# Altium PCB PCB3.PcbDoc
Units mil, origin at the board's own origin, x right, y up, seen from the top; angles counter-clockwise.
Board outline 1410.03 x 2030.03 mil, 2 copper layers (Top Layer, Bottom Layer); 41 components, 194 nets, 508 pads, 198 vias.
Unrouted connection lines stored in the file: 13.
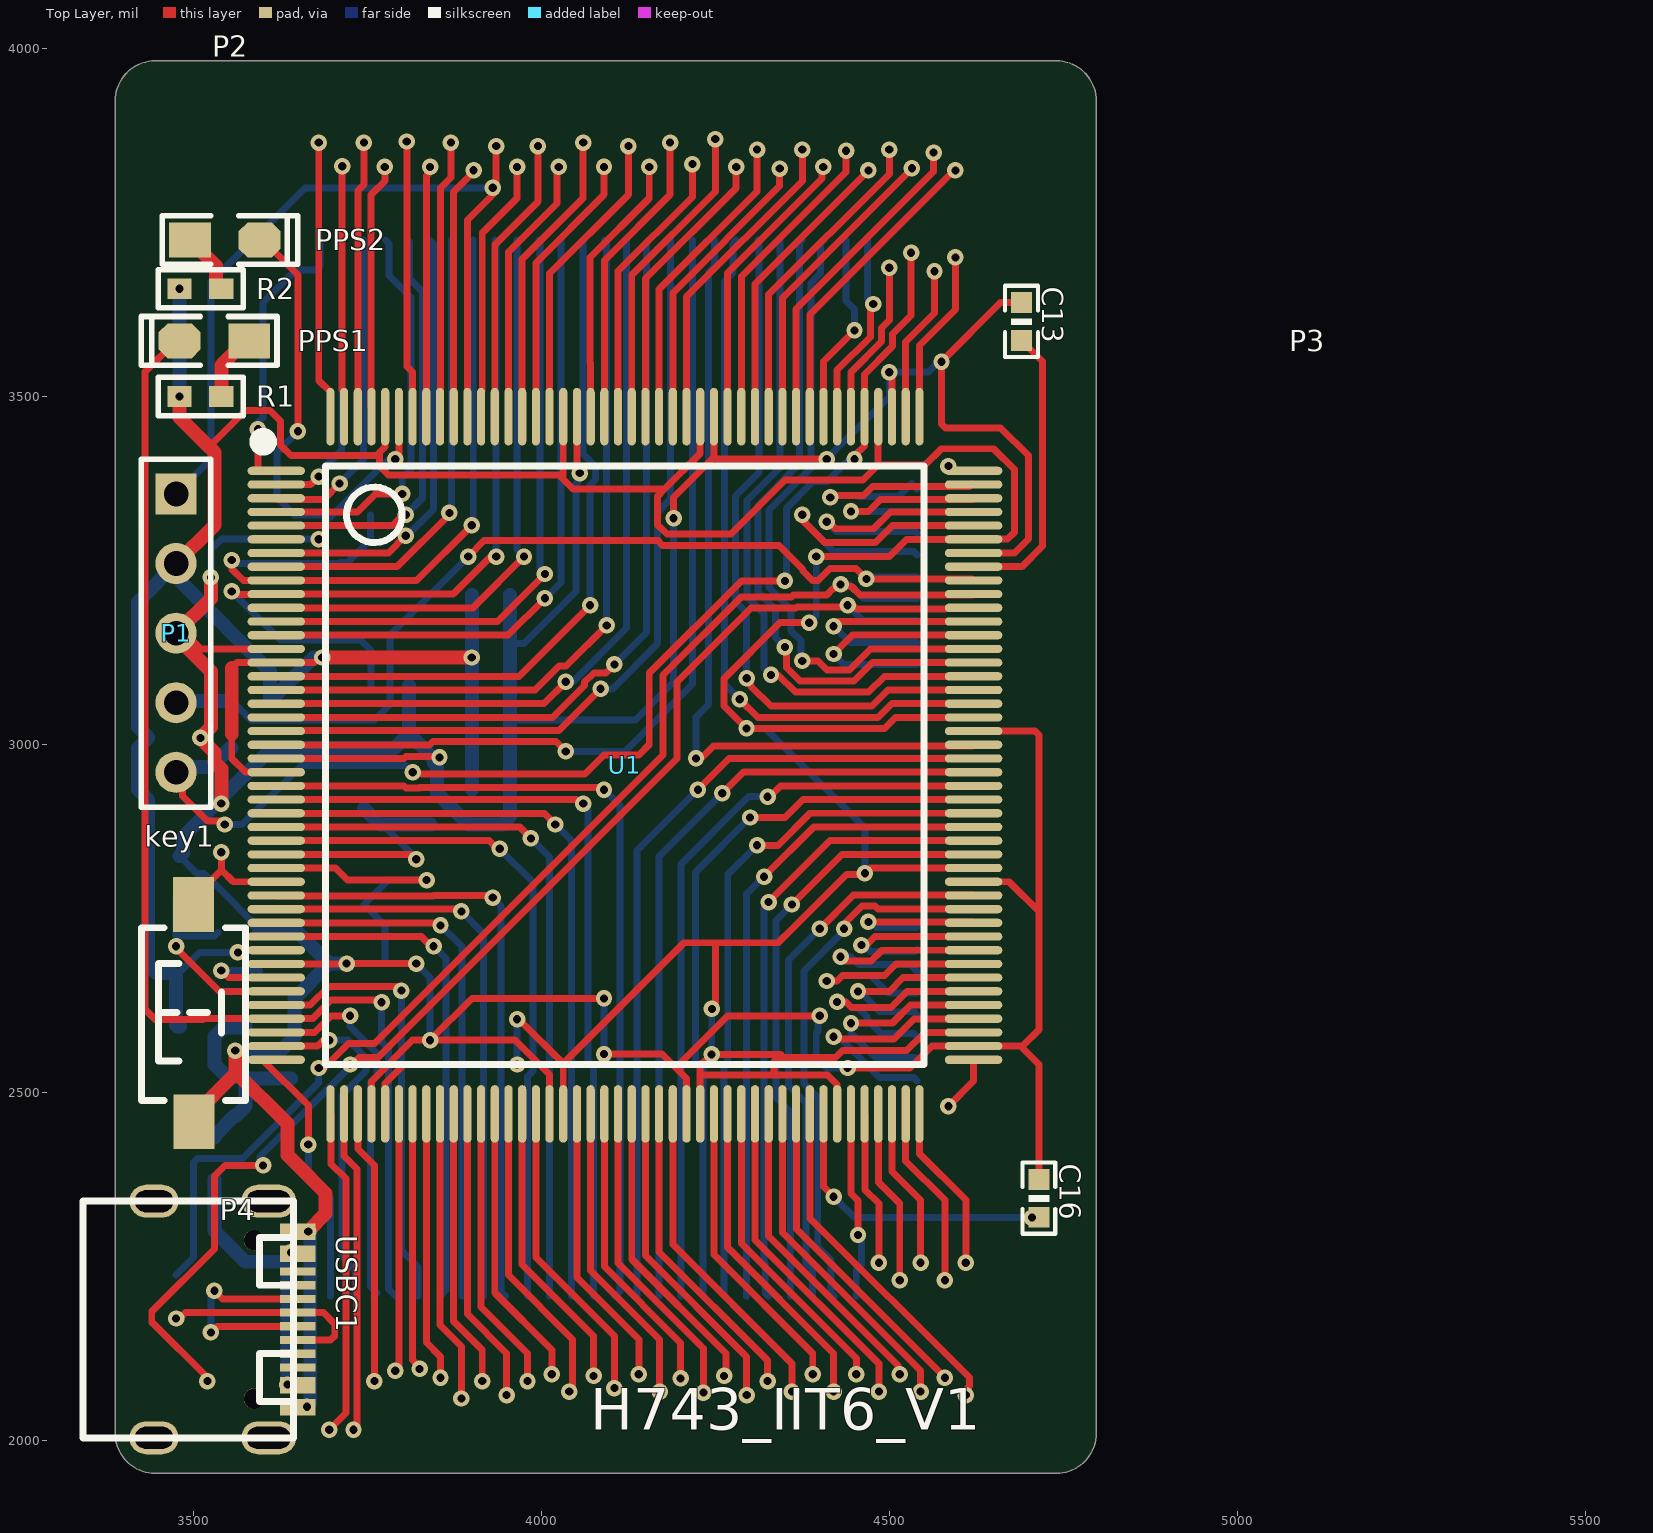
[diagram p0: Top Layer view]
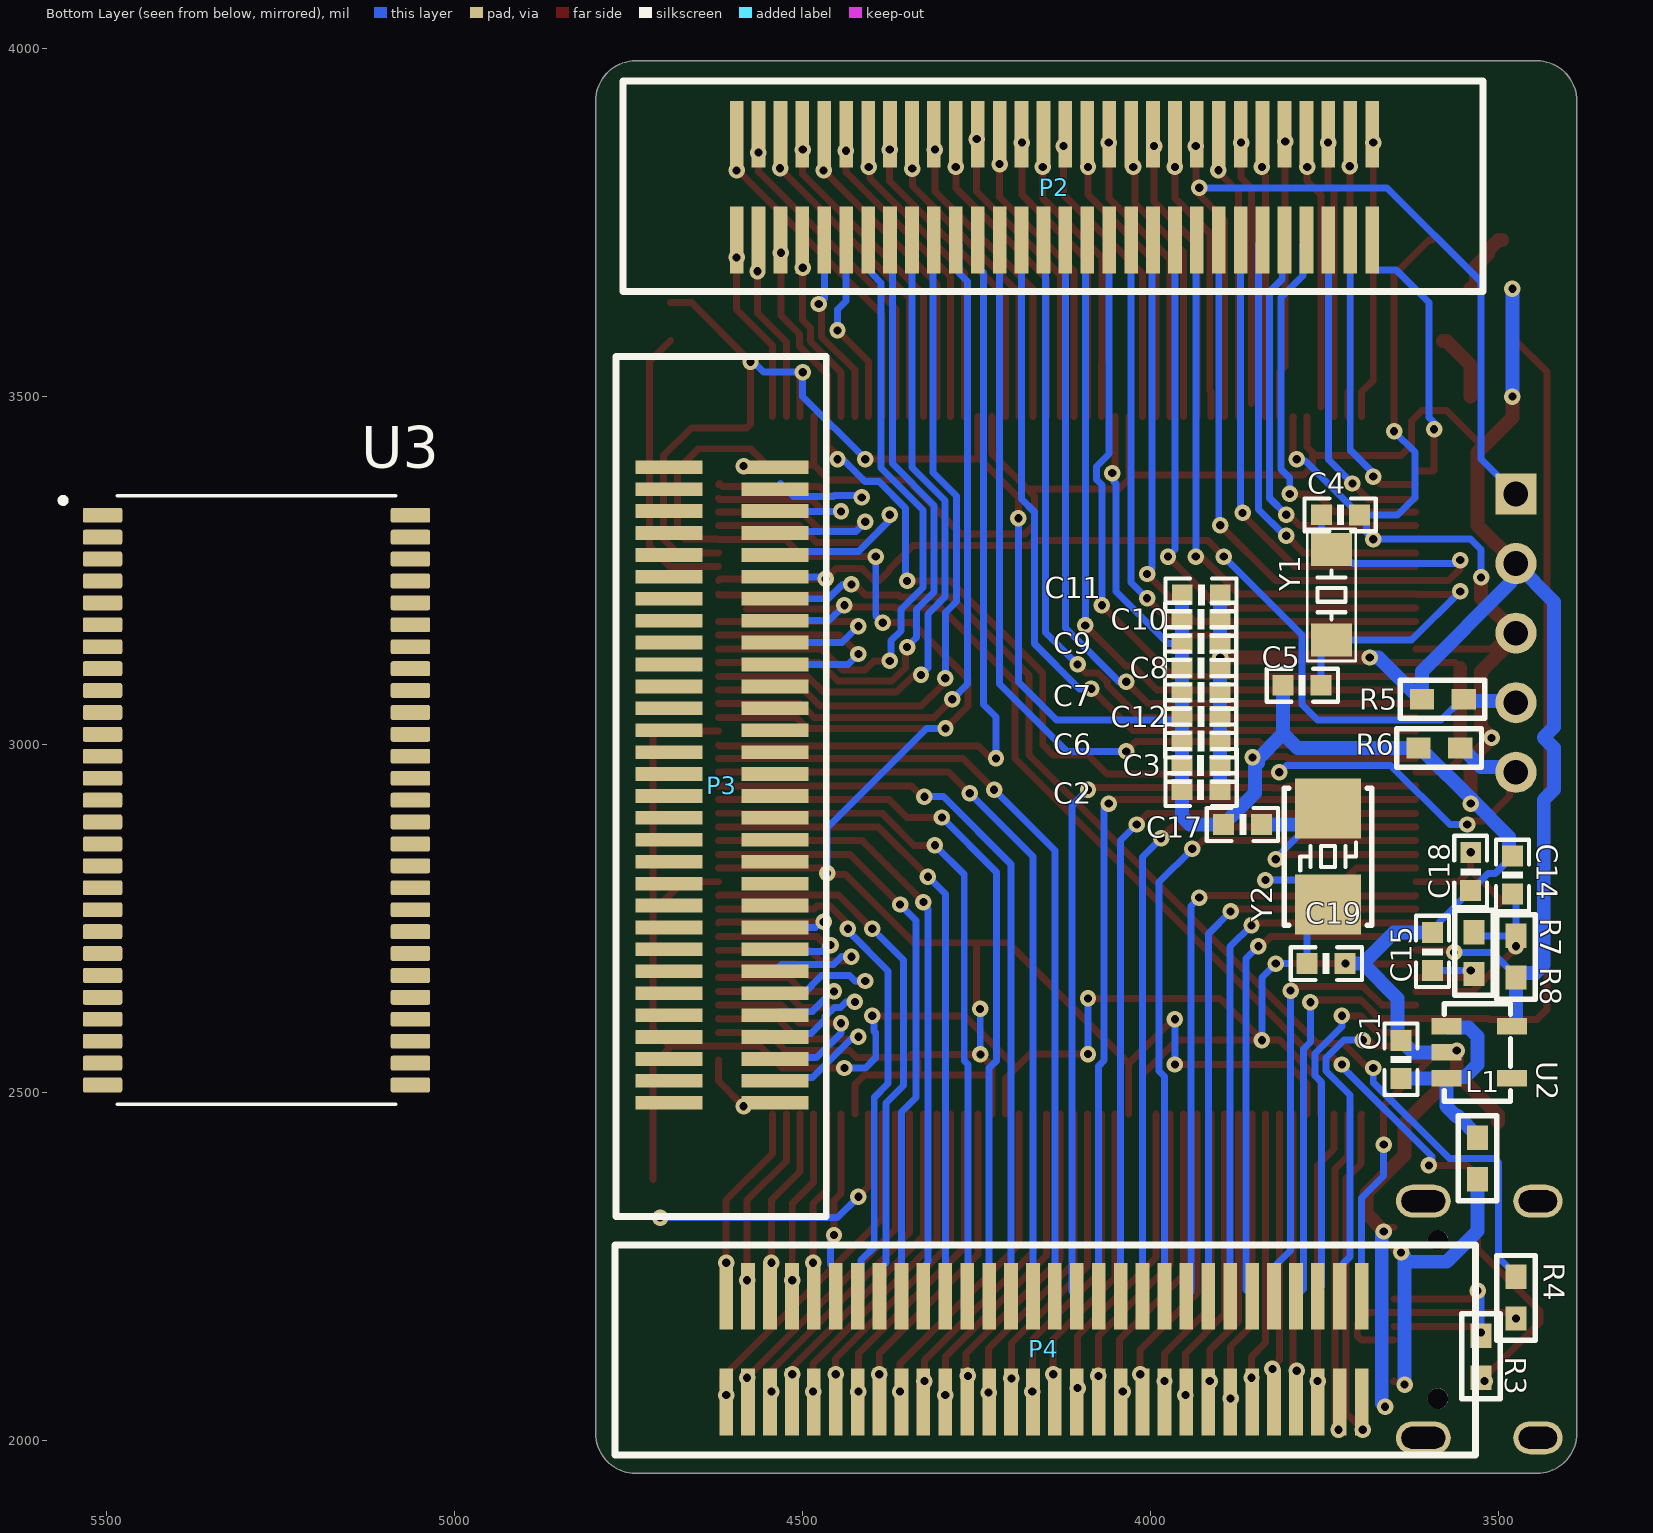
[diagram p1: Bottom Layer view, seen from below]

## Layer stack, top to bottom
Top Solder: solder mask 0.4, Solder Resist, Dk 3.5
Top Layer: signal copper 1.4
Dielectric 1: dielectric 12.6, FR-4, Dk 4.8
Bottom Layer: signal copper 1.4
Bottom Solder: solder mask 0.4, Solder Resist, Dk 3.5

## Board outline
3387.49,2010 ccw(c3445,2010) 3445,1952.48 4740,1952.48 ccw(c4740,2010) 4797.52,2010 ccw(c4790,2010) 4797.51,2010.04 4797.52,3925 ccw(c4740,3925) 4740,3982.51 3445,3982.51 ccw(c3445,3925) 3387.49,3925

## Design rules (kind name [scope] priority, off if disabled: settings)
Clearance [All] p1: gap=6 ignorepadtopadclearanceinfootprint=FALSE
ComponentClearance [All] p1 off: gap=10 collisioncheckmode=3 verticalgap=10 showdistances=FALSE
Height [All] p1 off: minheight=0 maxheight=1000 prefheight=500
PolygonConnect [All] p1: connectstyle=Relief reliefconductorwidth=10 reliefentries=4 polygonreliefangle="90 Angle" airgapwidth=10
RoutingVias [All] p1: holewidth=28 width=50 viastyle="Through Hole" minholewidth=28 minwidth=50 maxholewidth=28 maxwidth=50
SolderMaskExpansion [All] p1: expansion=4 istentingtop=FALSE
Width [All] p1: maxlimit=60 minlimit=10 preferedwidth=10 minimp=50.000000 maximp=50.000000 favimp=50.000000
28 further rules are at their usual default settings.

## Components (designator, comment, footprint, x,y, rotation, side; value= is the part's Value field where it differs from the comment)
C1 "Cap Semi" 0603-C 3640,2520 r90 bottom value=105
C2 "Cap Semi" 0603-C 3955,2935 r180 bottom value=104
C3 "Cap Semi" 0603-C 3955,2970 r180 bottom value=105
C4 "" 0603-c 3700,3330 r0 bottom value=10P
C5 "" 0603-c 3809.5,3085.06 r180 bottom value=10P
C6 "" 0603-c 3900.5,3004.94 r0 bottom value=104
C7 "" 0603-c 3900.5,3074.94 r0 bottom value=104
C8 "" 0603-c 3900.5,3109.94 r0 bottom value=104
C9 "" 0603-c 3900.5,3144.94 r0 bottom value=104
C10 "" 0603-c 3900.5,3179.94 r0 bottom value=104
C11 "" 0603-c 3900,3215 r0 bottom value=106
C12 "" 0603-c 3900.5,3039.94 r0 bottom value=104
C13 "" 0603-c 4689.94,3580.5 r90 top value=2.2UF
C14 "" 0603-c 3479.94,2839.5 r270 bottom locked value=104
C15 "" 0603-c 3595,2675 r90 bottom value=104
C16 "" 0603-c 4714.94,2320.5 r90 top value=2.2UF
C17 "" 0603-c 3840.5,2884.94 r0 bottom value=20P
C18 "" 0603-c 3540,2790 r90 bottom value=104
C19 "" 0603-c 3775,2685 r180 bottom value=20P
key1 "KEY" "TSW SMD-3*6*2.5" 3500,2615 r90 top
L1 "L" 0603-r 3530,2435 r270 bottom
P1 "Header 5" HDR1X5 3475,3360 r270 top
P2 "Header 30X2" BTB60 4138.5,3800 r90 top
P3 "Header 30X2" BTB60 4615,2941.46 r0 top
P4 "Header 30X2" BTB60 4153.07,2131.97 r270 top locked
PPS1 "LED" "LED 0805G" 3530,3580 r180 top
PPS2 "LED" "LED 0805G" 3545,3725 r0 top
R1 "1k" 0603-R 3540,3500 r180 top
R2 "1k" 0603-r 3540,3655 r180 top
R3 "0Ω" 0603-r 3525,2150 r270 bottom
R4 "0Ω" 0603-r 3475,2175 r90 bottom
R5 "10K" 0603-r 3610,3065 r180 bottom
R6 "10K" 0603-r 3615,2995 r180 bottom
R7 "0" 0603-r 3475,2665 r90 bottom
R8 "0" 0603-r 3535,2730 r270 bottom
U1 "STM32H743IIT6" "LQFP176 24x24_M" 4120,2970 r270 top locked
U2 "RT9013" SOT23-5 3527.76,2557.4 r270 bottom
U3 "W9825G6KH-6" SOP80P1176X120-54N 5285,2920 r180 bottom
USBC1 "TYPE-C 3.1" TYPE-C-USB-17 3546.72,2173.58 r270 top locked
Y1 "32.768KHz" "OSC 3215-2P" 3740,3215 r90 bottom
Y2 "25M" "OSC 5032-2P" 3745,2838.9 r90 bottom

## Footprints (in the part's own frame and the unit in brackets; to place one, negate y for a bottom-side part, rotate by r counter-clockwise, add the part's x,y. Pads: shape width x height; smd on the part's side, far side on the other; paste and mask are expansions set on the pad)
0603-C [mil]
  rect 30x30 smd: 1(0,0) 2(54.5,-0.06)
  silkscreen extent -24,-24 79,24
0603-c [mil]
  rect 30x30 smd: 1(0,0) 2(54.5,-0.06)
  silkscreen extent -24,-24 79,24
0603-r [mil]
  rect 35x30 smd: 1(0,0) 2(60,0)
  silkscreen extent -31,-28 91,28, body extent -22,-19 82,19, height 39
0603-R [mil]
  rect 35x30 smd: 1(0,0) 2(60,0)
  silkscreen extent -31,-28 91,28, body extent -22,-19 82,19, height 39
BTB60 [mm]
  rect 2.44x0.5 smd far side: 1(-1.905,-11.594) 2(1.955,-11.594) 3(-1.905,-10.794) 4(1.955,-10.794) 5(-1.905,-9.994) 6(1.955,-9.994) 7(-1.905,-9.194) 8(1.955,-9.194) 9(-1.905,-8.394) 10(1.955,-8.394) 11(-1.905,-7.594) 12(1.955,-7.594) 13(-1.905,-6.794) 14(1.955,-6.794) 15(-1.905,-5.994) 16(1.955,-5.994) 17(-1.905,-5.194) 18(1.955,-5.194) 19(-1.905,-4.394) 20(1.955,-4.394) 21(-1.905,-3.594) 22(1.955,-3.594) 23(-1.905,-2.794) 24(1.955,-2.794) 25(-1.905,-1.994) 26(1.955,-1.994) 27(-1.905,-1.194) 28(1.955,-1.194) 29(-1.905,-0.394) 30(1.955,-0.394) 31(-1.905,0.406) 32(1.955,0.406) 33(-1.905,1.206) 34(1.955,1.206) 35(-1.905,2.006) 36(1.955,2.006) 37(-1.905,2.806) 38(1.955,2.806) 39(-1.905,3.606) 40(1.955,3.606) 41(-1.905,4.406) 42(1.955,4.406) 43(-1.905,5.206) 44(1.955,5.206) 45(-1.905,6.006) 46(1.955,6.006) 47(-1.905,6.806) 48(1.955,6.806) 49(-1.905,7.606) 50(1.955,7.606) 51(-1.905,8.406) 52(1.955,8.406) 53(-1.905,9.206) 54(1.955,9.206) 55(-1.905,10.006) 56(1.955,10.006) 57(-1.905,10.806) 58(1.955,10.806) 59(-1.905,11.606) 60(1.955,11.606)
HDR1X5 [mm] "Connector; Header; 5 Position"
  rect 1.5x1.5 hole 0.9: 1(0,0)
  round 1.5 hole 0.9: 2(2.54,0) 3(5.08,0) 4(7.62,0) 5(10.16,0)
  silkscreen extent -1.27,-1.27 11.43,1.27
"LED 0805G" [mil] "绿色0805LED"
  rect 60x50 smd: 1(-50,0)
  oct 60x50 smd: 2(50,0)
  silkscreen extent -90,-35 105,35, body extent -39,-25 39,25, height 32
"LQFP176 24x24_M" [mm] "176脚，体宽24x24mm，脚距0.5mm"
  oval 0.3x2.1 smd: 1(-10.75,-12.727) 2(-10.25,-12.727) 3(-9.75,-12.727) 4(-9.25,-12.727) 5(-8.75,-12.727) 6(-8.25,-12.727) 7(-7.75,-12.727) 8(-7.25,-12.727) 9(-6.75,-12.727) 10(-6.25,-12.727) 11(-5.75,-12.727) 12(-5.25,-12.727) 13(-4.75,-12.727) 14(-4.25,-12.727) 15(-3.75,-12.727) 16(-3.25,-12.727) 17(-2.75,-12.727) 18(-2.25,-12.727) 19(-1.75,-12.727) 20(-1.25,-12.727) 21(-0.75,-12.727) 22(-0.25,-12.727) 23(0.25,-12.727) 24(0.75,-12.727) 25(1.25,-12.727) 26(1.75,-12.727) 27(2.25,-12.727) 28(2.75,-12.727) 29(3.25,-12.727) 30(3.75,-12.727) 31(4.25,-12.727) 32(4.75,-12.727) 33(5.25,-12.727) 34(5.75,-12.727) 35(6.25,-12.727) 36(6.75,-12.727) 37(7.25,-12.727) 38(7.75,-12.727) 39(8.25,-12.727) 40(8.75,-12.727) 41(9.25,-12.727) 42(9.75,-12.727) 43(10.25,-12.727) 44(10.75,-12.727) 89(10.75,12.727) 90(10.25,12.727) 91(9.75,12.727) 92(9.25,12.727) 93(8.75,12.727) 94(8.25,12.727) 95(7.75,12.727) 96(7.25,12.727) 97(6.75,12.727) 98(6.25,12.727) 99(5.75,12.727) 100(5.25,12.727) 101(4.75,12.727) 102(4.25,12.727) 103(3.75,12.727) 104(3.25,12.727) 105(2.75,12.727) 106(2.25,12.727) 107(1.75,12.727) 108(1.25,12.727) 109(0.75,12.727) 110(0.25,12.727) 111(-0.25,12.727) 112(-0.75,12.727) 113(-1.25,12.727) 114(-1.75,12.727) 115(-2.25,12.727) 116(-2.75,12.727) 117(-3.25,12.727) 118(-3.75,12.727) 119(-4.25,12.727) 120(-4.75,12.727) 121(-5.25,12.727) 122(-5.75,12.727) 123(-6.25,12.727) 124(-6.75,12.727) 125(-7.25,12.727) 126(-7.75,12.727) 127(-8.25,12.727) 128(-8.75,12.727) 129(-9.25,12.727) 130(-9.75,12.727) 131(-10.25,12.727) 132(-10.75,12.727)
  oval 2.1x0.3 smd: 45(12.727,-10.75) 46(12.727,-10.25) 47(12.727,-9.75) 48(12.727,-9.25) 49(12.727,-8.75) 50(12.727,-8.25) 51(12.727,-7.75) 52(12.727,-7.25) 53(12.727,-6.75) 54(12.727,-6.25) 55(12.727,-5.75) 56(12.727,-5.25) 57(12.727,-4.75) 58(12.727,-4.25) 59(12.727,-3.75) 60(12.727,-3.25) 61(12.727,-2.75) 62(12.727,-2.25) 63(12.727,-1.75) 64(12.727,-1.25) 65(12.727,-0.75) 66(12.727,-0.25) 67(12.727,0.25) 68(12.727,0.75) 69(12.727,1.25) 70(12.727,1.75) 71(12.727,2.25) 72(12.727,2.75) 73(12.727,3.25) 74(12.727,3.75) 75(12.727,4.25) 76(12.727,4.75) 77(12.727,5.25) 78(12.727,5.75) 79(12.727,6.25) 80(12.727,6.75) 81(12.727,7.25) 82(12.727,7.75) 83(12.727,8.25) 84(12.727,8.75) 85(12.727,9.25) 86(12.727,9.75) 87(12.727,10.25) 88(12.727,10.75) 133(-12.727,10.75) 134(-12.727,10.25) 135(-12.727,9.75) 136(-12.727,9.25) 137(-12.727,8.75) 138(-12.727,8.25) 139(-12.727,7.75) 140(-12.727,7.25) 141(-12.727,6.75) 142(-12.727,6.25) 143(-12.727,5.75) 144(-12.727,5.25) 145(-12.727,4.75) 146(-12.727,4.25) 147(-12.727,3.75) 148(-12.727,3.25) 149(-12.727,2.75) 150(-12.727,2.25) 151(-12.727,1.75) 152(-12.727,1.25) 153(-12.727,0.75) 154(-12.727,0.25) 155(-12.727,-0.25) 156(-12.727,-0.75) 157(-12.727,-1.25) 158(-12.727,-1.75) 159(-12.727,-2.25) 160(-12.727,-2.75) 161(-12.727,-3.25) 162(-12.727,-3.75) 163(-12.727,-4.25) 164(-12.727,-4.75) 165(-12.727,-5.25) 166(-12.727,-5.75) 167(-12.727,-6.25) 168(-12.727,-6.75) 169(-12.727,-7.25) 170(-12.727,-7.75) 171(-12.727,-8.25) 172(-12.727,-8.75) 173(-12.727,-9.25) 174(-12.727,-9.75) 175(-12.727,-10.25) 176(-12.727,-10.75)
  silkscreen extent -12.06,-13.46 10.92,10.92, body extent -13,-13 13,13, height 1.45
"OSC 3215-2P" [mm] "3.2*1.5*0.6mm(长宽高)"
  rect 1.2x1.5 smd: 1(-1.65,0) 2(1.65,0)
  silkscreen extent -2.41,-0.89 2.41,0.89, body extent -1.6,-0.75 1.6,0.75, height 0.61
"OSC 5032-2P" [mm] "5mm*3.2mm*0.8mm(长*宽*高)"
  rect 2.2x2.4 smd: 1(-1.75,0) 2(1.75,0)
  silkscreen extent -2.5,-1.6 2.5,1.6, body extent -2.5,-1.6 2.5,1.6, height 0.86
SOP80P1176X120-54N [mm]
  rrect25% 1.44x0.54 smd: 1(-5.62,10.4) 2(-5.62,9.6) 3(-5.62,8.8) 4(-5.62,8) 5(-5.62,7.2) 6(-5.62,6.4) 7(-5.62,5.6) 8(-5.62,4.8) 9(-5.62,4) 10(-5.62,3.2) 11(-5.62,2.4) 12(-5.62,1.6) 13(-5.62,0.8) 14(-5.62,0) 15(-5.62,-0.8) 16(-5.62,-1.6) 17(-5.62,-2.4) 18(-5.62,-3.2) 19(-5.62,-4) 20(-5.62,-4.8) 21(-5.62,-5.6) 22(-5.62,-6.4) 23(-5.62,-7.2) 24(-5.62,-8) 25(-5.62,-8.8) 26(-5.62,-9.6) 27(-5.62,-10.4) 28(5.62,-10.4) 29(5.62,-9.6) 30(5.62,-8.8) 31(5.62,-8) 32(5.62,-7.2) 33(5.62,-6.4) 34(5.62,-5.6) 35(5.62,-4.8) 36(5.62,-4) 37(5.62,-3.2) 38(5.62,-2.4) 39(5.62,-1.6) 40(5.62,-0.8) 41(5.62,0) 42(5.62,0.8) 43(5.62,1.6) 44(5.62,2.4) 45(5.62,3.2) 46(5.62,4) 47(5.62,4.8) 48(5.62,5.6) 49(5.62,6.4) 50(5.62,7.2) 51(5.62,8) 52(5.62,8.8) 53(5.62,9.6) 54(5.62,10.4)
  silkscreen extent -7.16,-11.11 5.08,11.11, body extent -5.88,-11.11 5.88,11.11, height 1.2
SOT23-5 [mm]
  rect 0.6x1.1 smd: 1(-0.95,-1.2) 2(0,-1.2) 3(0.95,-1.2) 4(0.95,1.2) 5(-0.95,1.2)
  silkscreen extent -1.78,-1.27 1.78,1.14, body extent -1.55,-0.9 1.55,0.9, height 1.45
"TSW SMD-3*6*2.5" [mm] "3*6*2.5mm"
  rect 2x1.5 smd: 1(-3.996,-0.02) 2(3.937,0)
  silkscreen extent -3.21,-1.9 3.09,1.9, body extent -4,-1.88 4,1.62, height 2.59
TYPE-C-USB-17 [mm]
  oval 1.2x2 hole 0.8 slot 1.6 at 90 deg: 0(-4.32,1.556) 0(4.32,1.556)
  oval 1.2x1.8 hole 0.8 slot 1.4 at 90 deg: 0(-4.32,-2.624) 0(4.32,-2.624)
  rect 0.3x1.3 smd: A1(-3.35,2.623) A4(-2.55,2.623) A5(-1.25,2.623) A6(-0.25,2.623) A7(0.25,2.623) A8(-1.75,2.624) A9(2.55,2.623) A12(3.35,2.623) B1(3.05,2.623) B4(2.25,2.623) B5(1.75,2.623) B6(0.75,2.623) B7(-0.75,2.623) B8(1.25,2.624) B9(-2.25,2.623) B12(-3.05,2.623)
  round 0.75 hole 0.75 unplated: ""(-2.89,1.026) ""(2.89,1.026)
  silkscreen extent -4.32,-5.23 4.32,2.47

## Part data
C1 C2 C3: "Capacitor (Semiconductor SIM Model)", LatestRevisionDate=29-May-2009, LatestRevisionNote="IPC-7351 Footprint Added.", PackageDescription="Chip Capacitor", PackageReference=C1206, Published=8-Jun-2000, Publisher="Altium Limited"
C4 C5 C6 C7 C8 C9 C10 C11 C13 C14 C15 C16 C17 C18 C19: library part Cap_1_1, "Capacitor", LatestRevisionDate=17-Jul-2002, LatestRevisionNote="Re-released for DXP Platform.", PackageDescription="Radial Cap, Thru-Hole; 2 Leads; 0.3 in Pin Spacing", PackageReference=RAD-0.3, Published=8-Jun-2000, Publisher="Altium Limited"
C12: library part Cap_1_1, "104", LatestRevisionDate=17-Jul-2002, LatestRevisionNote="Re-released for DXP Platform.", PackageDescription="Radial Cap, Thru-Hole; 2 Leads; 0.3 in Pin Spacing", PackageReference=RAD-0.3, Published=8-Jun-2000, Publisher="Altium Limited"
P1: "Header, 5-Pin"
P2 P3 P4: "Header, 30-Pin, Dual row", LatestRevisionDate=17-Jul-2002, LatestRevisionNote="Re-released for DXP Platform.", Publisher="Altium Limited"
R1 R2 R3 R4 R5 R6 R7 R8: library part RES, "Resistor", LatestRevisionDate=17-Jul-2002, LatestRevisionNote="Re-released for DXP Platform.", PackageDescription="Axial Device, Thru-Hole; 2 Leads; 0.4 in Pin Spacing", PackageReference=AXIAL-0.4, Published=8-Jun-2000, Publisher="Altium Limited"
U1: BOM_LCSC Assembly=Yes, BOM_Manufacturer=STMicroelectronics, BOM_Manufacturer Part=STM32H743IIT6, BOM_Supplier=LCSC, BOM_Supplier Part=C89597, Contributor=LCSC, SMT Type=Extend, spicePre=U, spiceSymbolName=STM32H743IIT6
U3: library part IS42S16160B, "32MB SDRAM"
Y1 Y2: library part XTAL, "Crystal Oscillator", LatestRevisionDate=17-Jul-2002, LatestRevisionNote="Re-released for DXP Platform.", Published=8-Jun-2000, Publisher="Altium Limited"

## Via types
v1: diameter 23.62, hole 11.81, Top Layer to Bottom Layer, 198 vias

## Nets (pads, with @x,y where several pads share a name; then routed paths per layer and width w, separated by ;. In a path a pad name is that pad's centre, name@x,y a point inside that pad or via, vN(x,y) a via of type N, cw(c..) or ccw(c..) an arc to the next point about the centre after c; other vN are vias at no path point)
3.3V: C2.2 C3.2 C6.1 C7.1 C8.1 C9.1 C10.1 C11.1 C12.1 P1.2 R1.2 R2.2 R5.1 R7.1 U1.15 U1.23 U1.36 U1.49 U1.62 U1.72 U1.82 U1.91 U1.103 U1.114 U1.127 U1.136 U1.149 U1.159 U1.172 U2.5 | length 7704.3
  Top Layer w10: 3517.5,3432.5 3527.5,3432.5 3575,3480 3610,3480 3625,3465 3625,3430 3640,3415 3762.74,3415 3767.19,3419.45 ; 3555,3015 3555,2980 3574.5,2960.5 3618.59,2960.5 U1.23 ; 3555,3110 3562.64,3117.64 U1.15 3673.95,3117.64 ; v1(3563.84,2701.16) 3567.29,2704.6 3618.59,2704.6 U1.36 ; U1.49 3775.51,2512.88 3802.63,2540 v1(3965,2540) ; U1.172 3775.51,3427.77 3767.19,3419.45 ; v1(3965,2605) 3967.83,2605 4031.42,2541.42 ; U1.62 4031.42,2541.42 ; 4031.42,3387.19 U1.159 ; U1.72 4228.27,2525 ; U1.149 4228.27,3418.27 4177.19,3367.19 ; v1(4245,2620) 4250,2625 4250,2715 ; 4344.61,2554.61 v1(4244.61,2554.61) 4228.27,2538.27 4228.27,2525 ; v1(4385,3175) 4342.74,3175 4262.19,3094.45 4262.19,3055.55 v1(4294.74,3023) 4493,3023 4508.9,3038.9 U1.114 ; v1(4395,3270) 4500,3270 4524.8,3294.8 U1.127 4621.41,3295.15 4670.15,3295.15 4680,3305 4680,3395 4650,3425 4575,3425 4551.57,3401.57 4483.83,3401.57 ; U1.82 4424.77,2469.28 4424.77,2511.16 4410.93,2525 4335,2525 ; U1.136 4483.83,3470.72 4483.83,3401.57 ; U1.91 4551.14,2586.14 4525,2560 4432.74,2560 4422.74,2550 4340,2550 4334.14,2544.14 4334.14,2525.86 4335,2525 ; U1.103 4472.36,2822.36 v1(4465,2815) 4463.19,2813.19 4438.19,2813.19 4360,2735 4340,2715 4250,2715 ; 3767.19,3419.45 3767.19,3400.55 3780.55,3387.19 4025.55,3387.19 4045.55,3367.19 4177.19,3367.19 ; 4031.42,2541.42 4205,2715 4250,2715 ; 4177.19,3367.19 4167.19,3357.19 4167.19,3315.55 4180.55,3302.19 4272.19,3302.19 4350,3380 4462.26,3380 4483.83,3401.57 ; 4228.27,2525 4335,2525
  Top Layer w20: P1.2 3530,3315 3530,3420 3517.5,3432.5 3480,3470 v1(3480,3500) ; 3555,3015 3555,3110 ; v1(3685,3125) v1(3900,3125)
  Bottom Layer w10: R7.1 3475,2666.64 3475,2667.5 3508.66,2701.16 v1(3563.84,2701.16) ; v1(3965,2540) v1(3965,2605) ; v1(4244.61,2554.61) 4244.8,2554.8 4244.8,2619.8 v1(4245,2620) ; v1(4294.74,3023) 4322,3023 4465,2880 v1(4465,2815) ; v1(4385,3175) 4395,3185 v1(4395,3270)
  Bottom Layer w20: R7.1 3475,2596.61 3476.81,2594.8 U2.5 ; R7.1@3475,2666.64 3470,2671.64 3446.72,2671.64 3435,2683.36 3435,2920 3420,2935 3420,2995 3435,3010 3420,3025 3420,3205 P1.2 3482.47,3252.53 3482.47,3232.53 3610,3105 R5.1 3612.5,3065 3672.5,3125 v1(3685,3125) ; v1(3480,3500) v1(3480,3655) ; C11.1 3900.25,3214.75 3900.25,3179.94 3900.25,3144.94 3900.25,3125 3900.25,3109.94 3900.25,3074.94 3900.25,3039.94 3900.25,3004.94 3900.25,2969.94 3900.25,2935.19 C2.2
5V: C1.1 L1.1 U2.1 U2.3 | length 314.5
  Bottom Layer w20: L1.1 3530,2437.5 3558.36,2465.86 3560.86,2465.86 3575,2480 U2.3 ; U2.1 3573.19,2592.99 3542.99,2592.99 3530,2580 3530,2540 3548.19,2521.81 3573.19,2521.81 U2.3 ; C1.1 U2.3
BOOT0: P1.1 P2.44 U1.166 | length 1192.7
  Top Layer w10: U1.166 3893.62,3753.62 3935,3795 v1(3935,3860)
  Bottom Layer w10: P1.1 3525,3410 3525,3665 3660,3800 v1(3930,3800)
C0: P4.17 U1.32 | length 893.5
  Top Layer w10: U1.32 3619.74,2782.19 3844.45,2782.19 3845.07,2782.81 3927.19,2782.81 v1(3930,2780)
  Bottom Layer w10: v1(3930,2780) 3942.19,2767.81 3942.19,2213.36 P4.17
C1: P4.15 U1.33 | length 833.8
  Top Layer w10: U1.33 3878.01,2763.31 3881.31,2760 v1(3885,2760)
  Bottom Layer w10: v1(3885,2760) 3917.09,2727.91 P4.15
C2: P4.13 U1.34 | length 783.3
  Top Layer w10: U1.34 3847.69,2743.62 3851.31,2740 v1(3855,2740)
  Bottom Layer w10: v1(3855,2740) 3885.59,2709.41 P4.13
C3: P4.11 U1.35 | length 745.9
  Top Layer w10: U1.35 3827.38,2723.94 3841.31,2710 v1(3845,2710)
  Bottom Layer w10: v1(3845,2710) 3862.81,2692.19 3862.81,2215.69 P4.11
FMC_A0: U3.23
FMC_A1: U3.24
FMC_A2: U3.25
FMC_A3: U3.26
FMC_A4: U3.29
FMC_A5: U3.30
FMC_A6: U3.31
FMC_A7: U3.32
FMC_A8: U3.33
FMC_A9: U3.34
FMC_A10: U3.22
FMC_A11: U3.35
FMC_A12: U3.36
FMC_BA0: U3.20
FMC_BA1: U3.21
FMC_D0: U3.2
FMC_D1: U3.4
FMC_D2: U3.5
FMC_D3: U3.7
FMC_D4: U3.8
FMC_D5: U3.10
FMC_D6: U3.11
FMC_D7: U3.13
FMC_D8: U3.42
FMC_D9: U3.44
FMC_D10: U3.45
FMC_D11: U3.47
FMC_D12: U3.48
FMC_D13: U3.50
FMC_D14: U3.51
FMC_D15: U3.53
FMC_NBL0: U3.15
FMC_NBL1: U3.39
FMC_SDCKE0: U3.37
FMC_SDCLK: U3.38
FMC_SDNCAS: U3.17
FMC_SDNE0: U3.19
FMC_SDNRAS: U3.18
FMC_SDNWE: U3.16
GND: C1.2 C2.1 C3.1 C4.1 C5.1 C6.2 C7.2 C8.2 C9.2 C10.2 C11.2 C12.2 C13.2 C14.1 C15.2 C16.2 C17.2 C18.1 C19.2 key1.1 P1.3 PPS2.2 R6.1 U1.14 U1.22 U1.37 U1.48 U1.61 U1.71 U1.90 U1.102 U1.113 U1.126 U1.135 U1.148 U1.158 U1.171 U2.2 U3.6 U3.12 U3.28 U3.41 U3.46 U3.52 U3.54 USBC1.A1 USBC1.A12 USBC1.B1 USBC1.B12 | length 8801.2
  Top Layer w10: P1.3 3488.27,3160 3510.95,3137.32 U1.14 ; PPS2.2 3600,3725 3650,3675 v1@3650,3455 ; U1.37 3719.57,2684.57 v1(3720,2685) v1(3820,2685) ; U1.22 3802.58,2979.84 3805.55,2982.81 3852.19,2982.81 v1(3853.59,2981.41) ; USBC1.A1 USBC1.A1@3659.09,2305.47 ; U1.48 3755.83,2515.83 3815,2575 v1(3840,2575) ; v1(3790,3410) 3795.2,3415.2 U1.171 U1.171@3794.85,3470.72 ; U1.61 4011.39,2469.28 4011.39,2525.87 3962.26,2575 v1(3840,2575) ; U1.158 4051.1,3393.9 v1(4055,3390) ; v1(4090,2555) 4173.38,2555 4199.19,2529.19 ; v1(4090,2635) 3900,2635 v1(3840,2575) ; v1(4190,3325) 4190,3355 4247.95,3412.95 ; U1.71 4208.58,2519.79 4199.19,2529.19 ; U1.148 4247.95,3412.95 ; v1(4400,2610) 4267.74,2610 4199.19,2541.45 4199.19,2529.19 ; v1(4410,3410) 4250.91,3410 4247.95,3412.95 ; v1(4440,2535) 4530,2535 4561.46,2566.46 U1.90 4688.54,2566.46 ; v1(4500,3535) 4503.86,3531.14 U1.135 ; U1.102 4672.32,2802.68 4715,2760 ; U1.113 4709.14,3019.21 4715,3013.35 4715,2760 ; U1.126 4680.12,3275.12 4700,3295 4700,3415 4660,3455 4580.86,3455 4575,3460.86 v1(4575,3550) 4660,3635 C13.2 ; C16.2 4715,2540 4688.54,2566.46 ; 4688.54,2566.46 4691.46,2566.46 4715,2590 4715,2760
  Top Layer w20: key1.1 3500.79,2467.53 3560,2526.74 3560,2530 ; v1(3525,3240) 3525,3210 P1.3 3475,3155 3525,3105 3525,3025 3510,3010 v1(3510,3009.38) 3510,3008.39 3530,2988.39 3530,2975 3540,2965 v1@3540,2925 ; v1(3560,2560) 3560,2530 ; v1(3665,2300) 3665,2300.98 3690,2325.98 3690,2355 3650,2395 3635,2410 3635,2455 3560,2530
  Bottom Layer w10: C14.1 3504.69,2814.75 3515.25,2814.75 C18.1 3584.94,2745.06 3584.94,2739.5 C15.2 ; v1(3525,3240) 3525,3280 3540,3295 v1(3680,3295) 3690,3305 3690,3320 C4.1 ; v1(3650,3450) 3620,3420 3620,3355 3645,3330 C4.1 ; v1(3790,3410) 3787.39,3407.39 3777.39,3407.39 3734.14,3364.14 C4.1 ; 3801,2685 v1(3820,2685) 3840,2665 v1(3840,2575) ; C12.2 3960,3035 4135,3035 4190,3090 v1(4190,3325) ; C9.2 3975,3145 4050,3220 4050,3375 4052.39,3377.39 4052.39,3387.39 v1(4055,3390) ; v1(4090,2555) v1(4090,2635) ; v1(4400,2610) 4397.39,2607.39 4397.39,2587.39 4395,2585 4395,2550 4410,2535 v1(4440,2535) ; v1(4410,3410) 4500,3500 v1(4500,3535) 4556.31,3535 4571.31,3550 v1(4575,3550)
  Bottom Layer w20: C14.1 3484.68,2844.25 3484.68,2867.18 3536.25,2918.75 3607.5,2990 3610,2990 R6.1 3789,2995 3809.5,3015.5 ; U2.2 3622.84,2557.4 C1.2 3644.94,2579.5 3644.94,2634.94 3695,2685 ; C15.2 3650.5,2729.5 3695,2685 ; v1(3662.94,2048.1) 3667.81,2052.98 3667.81,2297.19 v1(3665,2300) ; v1(3720,2685) 3695,2685 ; C5.1 3809.5,3015.5 ; v1@3846.67,2975 3845.69,2974.02 3845.69,2973.33 3850,2969.02 3850,2930 C17.2 3943.28,2885 3955,2896.72 C2.1 3954.75,2935.25 3954.75,2970 3954.75,3005 3954.75,3040 3954.75,3075 3954.75,3110 3954.75,3145 3954.75,3180 3954.75,3214.81 C11.2 ; v1@3850,2975 3848.59,2976.41 3809.5,3015.5
  other v1: 3540,2915
NetC13_1: C13.1 U1.125 | length 419.1
  Top Layer w10: U1.125 4690.43,3255.43 4720,3285 4720,3550.44 C13.1
NetC16_1: C16.1 U1.81 | length 422.4
  Top Layer w10: U1.81 4405.43,2364.57 v1(4420,2350)
  Bottom Layer w10: v1(4420,2350) 4450,2320 v1(4705,2320)
NetL1_2: L1.2 USBC1.A4 USBC1.A9 USBC1.B4 USBC1.B9 | length 383.6
  Top Layer w10: USBC1.B4 USBC1.B4@3650.91,2084.09 ; USBC1.A4 USBC1.A4@3650.9,2274.88
  Bottom Layer w20: L1.2 3530,2300.95 3574.36,2256.6 3626.65,2256.6 ; v1(3635,2080) 3635,2263.96 3640,2268.96 v1(3640,2269.94)
NetPPS1_1: PPS1.1 R1.1 | length 99.5
  Top Layer w20: R1.1 3540,3545 3575,3580 PPS1.1
NetPPS2_1: PPS2.1 R2.1 | length 93
  Top Layer w20: PPS2.1 3500,3725 3515,3710 3515,3705 3532.5,3687.5 3532.5,3660 3537.5,3655 R2.1
NetR3_1: R3.1 USBC1.A7 USBC1.B7 | length 315.6
  Top Layer w10: v1(3525,2155) 3533.74,2163.74 USBC1.A7 ; v1(3530,2215) 3541.89,2203.11 USBC1.B7
  Bottom Layer w10: v1(3525,2155) 3525,2210 v1(3530,2215)
NetR4_1: R4.1 USBC1.A6 USBC1.B6 | length 312.9
  Top Layer w10: v1@3475,2170 3488.42,2183.42 USBC1.A6 3686.58,2183.42 3703,2167 3703,2149.91 3697.14,2144.05 USBC1.B6
  other v1: 3475,2175
OSC_IN: C17.1 U1.29 Y2.2 | length 378.9
  Top Layer w10: U1.29 3812.95,2842.05 v1(3820,2835)
  Bottom Layer w10: Y2.2@3767.86,2884.94 3771.8,2884.94 3820,2836.73 v1(3820,2835)
  Bottom Layer w20: Y2.2 Y2.2@3767.86,2884.94 ; Y2.2@3771.8,2884.94 C17.1
OSC_OUT: C19.1 U1.30 Y2.1 | length 425.2
  Top Layer w10: U1.30 3703.95,2822.36 3721.31,2805 v1(3835,2805)
  Bottom Layer w10: C19.1 3775,2740 Y2.1 3780,2805 v1(3835,2805)
PA0: P4.9 U1.40 | length 642.9
  Top Layer w10: U1.40 3619.19,2625.26 3667.74,2625.26 3694.9,2652.42 3792.58,2652.42 v1(3798.79,2646.21)
  Bottom Layer w10: v1(3798.79,2646.21) 3798.79,2272.71 3822.6,2248.9 P4.9
PA1: P4.7 PPS1.2 U1.41 | length 1774.3
  Top Layer w10: PPS1.2 3475,3580 3430,3535 3430,2620 3445,2605 3513.59,2605 3514.42,2605.83 U1.41 3670.94,2605.83 3697.92,2632.81 3767.19,2632.81 v1(3770.39,2629.61)
  Bottom Layer w10: v1(3770.39,2629.61) 3770.39,2572.12 3780.45,2562.07 3780.45,2217.62 P4.7
PA2: P4.5 U1.42 | length 544.8
  Top Layer w10: U1.42 3673.88,2586.14 3697.74,2610 v1(3725,2610)
  Bottom Layer w10: v1(3725,2610) 3725,2594.89 3763.81,2556.08 3763.81,2523.92 3754.39,2514.5 3754.39,2221.05 3764.04,2211.4 P4.5
PA3: P4.6 U1.47 | length 383.8
  Top Layer w10: U1.47 3736.14,2418.86 3760,2395 v1@3760,2095
  other v1: 3760,2085
PA4: P4.8 U1.50 | length 384.5
  Top Layer w10: v1@3790,2105.2 v1(3790,2100) ; U1.50 v1@3795.2,2100 ; v1(3790,2100) v1@3795.2,2100 ; v1(3790,2100) v1@3795.2,2100
PA5: P4.10 U1.51 | length 370.6
  Top Layer w10: U1.51 3814.88,2115.12 3825,2105 v1(3825,2102.5)
PA6: P4.12 U1.52 | length 377.4
  Top Layer w10: U1.52 3834.57,2140.43 3855,2120 v1@3855,2100
  other v1: 3855,2090
PA7: P4.14 U1.53 | length 421.7
  Top Layer w10: U1.53 3854.25,2165.75 3885,2135 v1(3885,2060)
PA8: P2.13 U1.119 | length 921.3
  Top Layer w10: v1(4375,3120) 4397.74,3120 4410.55,3107.19 4442.54,3107.19 4472.68,3137.32 U1.119
  Bottom Layer w10: v1(4375,3120) 4372.81,3122.19 4372.81,3149.45 4359,3163.26 4359,3193.74 4327.19,3225.55 4327.19,3337.08 4387.19,3397.08 4387.19,3663.3 4401.14,3677.25 4401.14,3720.16 P2.13
PA9: P3.41 U1.120 | length 338.5
  Top Layer w10: v1(4420,3130) 4447.01,3157.01 U1.120
  Bottom Layer w10: v1(4420,3130) 4435.08,3114.92 P3.41
PA10: P3.43 U1.121 | length 333.6
  Top Layer w10: v1(4420,3170) 4426.69,3176.69 U1.121
  Bottom Layer w10: v1(4420,3170) 4443.58,3146.42 P3.43
PA11/USB_DM: P3.45 R3.2 U1.122 | length 1947.1
  Top Layer w10: v1(3520,2085) 3520,2090 3440,2170 3440,2185 3530,2275 3530,2380 3545,2395 v1(3600,2395) ; v1(3725,2540) 3727.67,2540 3737.67,2550 3765,2550 4195,2980 4195,3090 4301.19,3196.19 4366.08,3196.19 4367.7,3197.81 4437.81,3197.81 v1(4440,3200) 4442.61,3197.39 4450.28,3197.39 4452.67,3195 U1.122@4581.08,3195
  Bottom Layer w10: v1(3600,2395) 3595.73,2399.27 3595.73,2407.55 3725,2536.82 v1(3725,2540) ; v1(4440,3200) 4462.09,3177.91 P3.45
PA12/USB_DP: P3.47 R4.2 U1.123 | length 1842.1
  Top Layer w10: v1(3680,2535) 3687.74,2535 3722.74,2570 3760,2570 4175,2985 4175,3100 4287.19,3212.19 4359.45,3212.19 4362.26,3215 4410.11,3215 4418.6,3223.49 4419.8,3223.49 4426.31,3230 v1(4430,3230) 4432.61,3227.39 4445.35,3227.39 4457.68,3215.06 4620.06,3215.06 U1.123
  Bottom Layer w10: R4.2@3474.72,2237.22 3500,2262.5 3500,2399.14 3505.86,2405 3570.56,2405 3680,2514.44 v1(3680,2535) ; v1(4430,3230) 4442.74,3230 4463.33,3209.41 P3.47
"PA13 SWDIO": P1.4 P3.49 R5.2 U1.124 | length 1436.3
  Top Layer w10: v1(3895,3270) 3917.81,3292.81 4167.3,3292.81 4173.92,3286.19 4341.55,3286.19 4375.55,3252.19 ; 4375.93,3249.07 4389.45,3235.55 4397.74,3235.55 4415,3252.81 4452.19,3252.81 v1(4467.13,3237.87) 4618.94,3237.87 U1.124
  Bottom Layer w10: R5.2 3552.5,3065 3582.5,3035 3760,3035 3782.17,3057.17 3782.17,3157.17 v1(3895,3270) ; v1(4467.13,3237.87) 4470.16,3240.91 P3.49
  Bottom Layer w20: P1.4 3477.5,3062.5 3547.5,3062.5 R5.2
"PA14 SWCLK": P1.5 P2.5 R6.2 U1.137 | length 1764.2
  Top Layer w10: P1.5@3476.33,2945 3483.99,2937.34 3483.99,2926.01 3520,2890 3540,2890 v1(3545,2885) ; 3827.61,2957.39 4062.39,2957.39 4090,2985 4140,2985 4155,3000 4155,3102.63 4287.37,3235 v1(4350,3235) ; v1(4450,3410) 4450,3415 4464.14,3429.14 4464.14,3470.72 U1.137 4464.49,3531.97 4504.81,3572.3 4504.81,3589.81 4531.36,3616.36 v1(4531.36,3706.64)
  Bottom Layer w10: v1(3545,2885) 3570,2885 3655,2970 3805,2970 v1(3815,2960) ; v1(4350,3235) 4352.19,3237.19 4352.19,3339.45 4390.55,3377.81 4410.55,3377.81 4442.74,3410 v1(4450,3410)
  Bottom Layer w20: P1.5 3482.47,2967.47 3524.97,2967.47 3552.5,2995 R6.2
PA15: P2.7 U1.138 | length 236.8
  Top Layer w10: U1.138 4444.8,3534.92 4488.81,3578.92 4488.81,3598.81 4500,3610 v1(4500,3685)
PB0: P4.20 U1.56 | length 411.6
  Top Layer w10: U1.56 3913.31,2191.69 3980,2125 v1(3980,2085)
PB1: P4.22 U1.57 | length 407.9
  Top Layer w10: U1.57 3932.99,2212.01 4015,2130 v1(4015,2095)
PB2: P4.24 U1.58 | length 439.2
  Top Layer w10: U1.58 3952.68,2237.32 4045,2145 4045,2075 v1(4040,2070)
PB3: P2.34 U1.161 | length 399.5
  Top Layer w10: U1.161 3992.05,3692.05 4090,3790 v1(4090,3830)
PB4: P2.36 U1.162 | length 430.2
  Top Layer w10: U1.162 3972.36,3697.36 4060,3785 v1(4060,3865)
PB5: P2.38 U1.163 | length 388.9
  Top Layer w10: U1.163 3952.68,3707.68 4022.39,3777.39 4022.39,3827.39 v1(4025,3830)
PB6: P2.40 U1.164 | length 414.6
  Top Layer w10: U1.164 3932.99,3717.99 3995,3780 v1(3995,3860)
PB7: P2.42 U1.165 | length 380.3
  Top Layer w10: U1.165 3913.31,3506.99 3915,3508.68 3915,3735 3965,3785 v1(3965,3830)
PB8: P2.46 U1.167 | length 366.1
  Top Layer w10: U1.167 3873.94,3793.94 3902.56,3822.56 v1(3902.56,3825.26)
PB9: P2.48 U1.168 | length 381.2
  Top Layer w10: U1.168@3855,3490 3855,3800 3870,3815 v1(3870,3865)
PB10: P4.58 U1.79 | length 467.6
  Top Layer w10: U1.79 4366.41,2468.59 4366.41,2303.59 v1(4580,2090)
PB11: P4.60 U1.80 | length 501
  Top Layer w10: U1.80 4386.09,2468.59 4386.09,2318.91 4615,2090 4615,2077.67 4612.61,2075.28 4612.61,2067.61 v1(4610,2065)
PB12: P3.3 U1.92 | length 360.9
  Top Layer w10: v1(4420,2580) 4423.43,2576.57 4506.57,2576.57 4535.48,2605.48 4620.72,2605.48 U1.92
  Bottom Layer w10: v1(4420,2580) 4427.26,2580 4485.92,2521.34 4535.16,2521.34 P3.3
PB13: P3.5 U1.93 | length 311.6
  Top Layer w10: v1(4445,2599.38) 4494.38,2599.38 4495,2600 4505,2600 4530.51,2625.51 U1.93
  Bottom Layer w10: v1(4445,2599.38) 4445,2597.74 4445,2585 4480,2550 4537.99,2550 P3.5
PB14: P3.7 U1.94 | length 347.3
  Top Layer w10: v1(4425,2630) 4437.74,2630 4445.55,2622.19 4502.19,2622.19 4525.2,2645.2 U1.94
  Bottom Layer w10: v1(4425,2630) 4437.74,2630 4445.55,2622.19 4454.45,2622.19 4467.81,2608.83 4467.81,2604.45 4487.93,2584.33 4535.16,2584.33 P3.7
PB15: P3.9 U1.95 | length 276.8
  Top Layer w10: v1(4455,2645) 4456.79,2645 4460,2641.79 4463.21,2645 4500,2645 4519.88,2664.88 U1.95
  Bottom Layer w10: v1(4455,2645) 4459.02,2645 4460,2644.02 4465,2639.02 4465,2637.74 4486.91,2615.83 4535.16,2615.83 P3.9
PC4: P4.16 U1.54 | length 400.9
  Top Layer w10: U1.54 3873.94,2171.06 3915,2130 v1(3915,2085)
PC5: P4.18 U1.55 | length 427.3
  Top Layer w10: U1.55 3893.62,2181.38 3950,2125 v1(3950,2065)
PC6: P2.21 U1.115 | length 1030.9
  Top Layer w10: v1(4285,3065) 4311,3039 4484,3039 4503.58,3058.58 U1.115
  Bottom Layer w10: P2.21 4275.16,3720.16 4275.16,3677.27 4263.19,3665.3 4263.19,3086.81 v1(4285,3065)
PC7: P2.19 U1.116 | length 1006.2
  Top Layer w10: v1(4295,3095) 4295,3091.31 4301.46,3084.86 4301.46,3083.54 4330,3055 4475,3055 4498.27,3078.27 U1.116
  Bottom Layer w10: v1(4295,3095) 4295,3189.86 4279.19,3205.67 4279.19,3356.96 4312.81,3390.58 4312.81,3723.68 P2.19
PC8: P2.17 U1.117 | length 970
  Top Layer w10: v1(4330,3100) 4340.11,3100 4364.92,3075.19 4470.19,3075.19 4492.95,3097.95 U1.117
  Bottom Layer w10: v1(4330,3100) 4320.19,3109.81 4320.19,3187.3 4295.19,3212.3 4295.19,3350.33 4342.99,3398.13 P2.17
PC9: P2.15 U1.118 | length 945.5
  Top Layer w10: v1(4350,3140) 4352.19,3137.81 4352.19,3110.55 4371.55,3091.19 4449.17,3091.19 4475.62,3117.64 U1.118
  Bottom Layer w10: v1(4350,3140) 4336.19,3153.81 4336.19,3193.92 4311.19,3218.92 4311.19,3343.7 4371.19,3403.7 4371.19,3721.7 P2.15
PC10: P2.9 U1.139 | length 278.7
  Top Layer w10: U1.139 4425.12,3537.86 4472.81,3585.55 4472.81,3628.83 v1(4476.99,3633.01)
  Bottom Layer w10: P2.9 4468.98,3641.02 v1(4476.99,3633.01)
PC11: P2.11 U1.140 | length 277.6
  Top Layer w10: U1.140 4405.43,3550.43 v1(4450,3595)
  Bottom Layer w10: P2.11 4437.48,3637.48 4450,3624.96 v1(4450,3595)
PC12: P2.2 U1.141 | length 441.9
  Top Layer w10: U1.141 4385.75,3618.01 4592.74,3825 v1(4595,3825)
PC13: P2.47 U1.8 | length 675.6
  Top Layer w10: U1.8 3792.69,3255.43 3867.78,3330.52 v1(3867.78,3332.78)
  Bottom Layer w10: v1(3867.78,3332.78) 3870.55,3335.55 P2.47
PC14: C4.2 P2.45 U1.9 Y1.2 | length 1060
  Top Layer w10: v1(3555,3265) 3555,3252.26 3571.86,3235.4 3618.59,3235.4 U1.9 3820.75,3235.75 v1(3900,3315)
  Bottom Layer w10: v1(3555,3265) 3560,3260 3709.61,3260 3710.95,3261.34 3721.38,3261.34 3754.5,3294.46 C4.2 ; v1(3900,3315) 3902.05,3317.05 P2.45
PC15: C5.2 P2.43 U1.10 Y1.1 | length 1145.1
  Top Layer w10: v1(3555,3220) 3559.28,3215.72 3618.59,3215.72 U1.10 3873.32,3216.06 3927.26,3270 v1(3935,3270)
  Bottom Layer w10: v1(3555,3220) 3624.96,3150.04 Y1.1 3755,3135.04 C5.2 ; P2.43 3935,3723.54 v1(3935,3270)
PD0: P2.4 U1.142 | length 461.4
  Top Layer w10: U1.142 4366.06,3626.06 4563.6,3823.6 v1(4563.6,3850.61)
PD1: P2.6 U1.143 | length 434
  Top Layer w10: U1.143 4346.38,3641.8 v1(4532.57,3827.99)
PD2: P2.8 U1.144 | length 455.7
  Top Layer w10: U1.144 4326.69,3646.69 4500,3820 v1(4500,3855)
PD3: P2.10 U1.145 | length 421.5
  Top Layer w10: U1.145 4307.01,3662.01 v1(4470,3825)
PD4: P2.12 U1.146 | length 444.7
  Top Layer w10: U1.146 4287.32,3672.32 4437.95,3822.95 v1(4437.95,3853.39)
PD5: P2.14 U1.147 | length 415.8
  Top Layer w10: U1.147 4267.64,3677.64 4403.54,3813.54 4403.54,3828.54 v1(4405,3830)
PD6: P2.16 U1.150 | length 452.9
  Top Layer w10: U1.150 4208.58,3643.58 4375,3810 v1(4375,3855)
PD7: P2.18 U1.151 | length 420.2
  Top Layer w10: U1.151 4188.9,3648.9 4342.5,3802.5 v1(4342.5,3827.67)
PD8: P3.11 U1.96 | length 365
  Top Layer w10: v1(4410,2660) 4425,2660 4432.81,2667.81 4492.81,2667.81 4509.57,2684.57 U1.96
  Bottom Layer w10: v1(4410,2660) 4425,2660 4432.81,2667.81 4472.74,2667.81 4498.07,2642.48 P3.11
PD9: P3.13 U1.97 | length 318.7
  Top Layer w10: v1(4430,2695) 4436.19,2688.81 4473.81,2688.81 4489.25,2704.25 U1.97
  Bottom Layer w10: v1(4430,2695) 4444.36,2695 4455.55,2683.81 4530.17,2683.81 P3.13
PD10: P3.15 U1.98 | length 251.1
  Top Layer w10: v1(4460,2711.62) 4467.14,2711.62 4479.46,2723.94 U1.98
  Bottom Layer w10: v1(4460,2711.62) 4463.59,2711.62 4472.61,2702.61 4537.13,2702.61 P3.15
PD11: P3.17 U1.99 | length 225
  Top Layer w10: v1(4470,2745) 4619.69,2745 U1.99
  Bottom Layer w10: v1(4470,2745) 4473.69,2745 4481.72,2736.97 P3.17
PD12: P4.47 U1.100 | length 775.9
  Top Layer w10: v1(4435,2735) 4435,2742.26 4460.55,2767.81 4479.45,2767.81 4483.95,2763.31 U1.100
  Bottom Layer w10: P4.47 4416.18,2211.81 4416.18,2258.82 4397.19,2277.81 4397.19,2492.81 4377.19,2512.81 4377.19,2674.45 4435,2732.26 v1(4435,2735)
PD13: P4.45 U1.101 | length 787.8
  Top Layer w10: v1(4400,2735) 4448.81,2783.81 4620.24,2783.81 U1.101
  Bottom Layer w10: P4.45 4389.53,2245.16 4380,2254.68 4380,2485 4355,2510 4355,2690 4389.53,2724.53
PD14: P4.43 U1.104 | length 872
  Top Layer w10: v1(4360,2770) 4432.05,2842.05 U1.104
  Bottom Layer w10: P4.43 4358.03,2471.97 4337.19,2492.81 4337.19,2747.19 v1(4360,2770)
PD15: P4.41 U1.105 | length 903.2
  Top Layer w10: v1(4326.54,2773.46) 4326.54,2773.79 4414.47,2861.73 U1.105
  Bottom Layer w10: P4.41 4321.69,2211.81 4321.69,2254.17 4320,2255.86 4320,2763.24 4326.54,2769.78 v1(4326.54,2773.46)
PE0: P2.50 U1.169 | length 361
  Top Layer w10: U1.169@3835,3471.06 3835,3817.33 3837.39,3819.72 3837.39,3827.39 v1(3840,3830)
PE1: P2.52 U1.170 | length 399
  Top Layer w10: v1(3806.64,3866.52) 3806.64,3543.36 3815,3535 3815,3471.18 U1.170
PE2: P2.59 U1.1 | length 406
  Top Layer w10: v1(3592.63,3453) 3592.63,3394.06 3593.47,3393.23 U1.1
  Bottom Layer w10: v1@3590,3460 3600,3470 3600,3635 3646.97,3681.97 3676.73,3681.97 3681.57,3686.81 P2.59
PE3: P2.57 U1.2 | length 419.5
  Top Layer w10: U1.2 3668.54,3373.54 v1(3680,3385)
  Bottom Layer w10: v1(3680,3385) 3680,3390 3713.07,3423.07 P2.57
PE4: P2.55 U1.3 | length 465.5
  Top Layer w10: U1.3 3620.63,3352.16 3687.16,3352.16 v1(3710,3375)
  Bottom Layer w10: v1(3710,3375) 3744.57,3409.57 P2.55
PE5: P2.53 U1.4 | length 577.3
  Top Layer w10: U1.4 3735.68,3334.17 3761.51,3360 v1(3800,3360)
  Bottom Layer w10: P2.53 3780.91,3720.16 3780.91,3674.09 3812.81,3642.19 3812.81,3395.55 3800,3382.74 v1(3800,3360)
PE6: P2.51 U1.5 | length 606.2
  Top Layer w10: U1.5 3785.8,3314.49 3801.31,3330 v1(3805,3330)
  Bottom Layer w10: v1(3805,3330) 3828.81,3353.81 3828.81,3651.19 3810.82,3669.18 3810.82,3721.74 P2.51
PE7: P4.40 U1.68 | length 464.2
  Top Layer w10: U1.68 4149.53,2265.47 4295,2120 v1(4295,2065)
PE8: P4.42 U1.69 | length 455.5
  Top Layer w10: U1.69 4169.21,2270.79 4325,2115 v1(4325,2085) v1@4320,2080
PE9: P4.44 U1.70 | length 469.8
  Top Layer w10: U1.70 4188.9,2281.1 4360,2110 v1(4360,2070)
PE10: P4.46 U1.73 | length 432.8
  Top Layer w10: U1.73 4247.95,2267.05 4390,2125 v1(4390,2095)
PE11: P4.48 U1.74 | length 462
  Top Layer w10: U1.74 4267.64,2277.36 4420,2125 v1(4420,2070)
PE12: P4.50 U1.75 | length 442.5
  Top Layer w10: U1.75 4287.32,2282.68 4452.63,2117.37 v1(4452.63,2094.93)
PE13: P4.52 U1.76 | length 472.7
  Top Layer w10: U1.76 4307.01,2287.99 4485,2110 v1(4485,2070)
PE14: P4.54 U1.77 | length 451.9
  Top Layer w10: U1.77 4326.69,2293.31 4512.39,2107.61 4512.39,2097.61 v1(4515,2095)
PE15: P4.56 U1.78 | length 481.2
  Top Layer w10: U1.78 4346.38,2298.62 4545,2100 v1(4545,2070)
PF0: P2.35 U1.16 | length 1029.1
  Top Layer w10: U1.16 3967.95,3097.95 v1(4070,3200)
  Bottom Layer w10: P2.35 4059.53,3417.73 4077.81,3399.45 4077.81,3380.55 4070,3372.74 v1(4070,3200)
PF1: P2.33 U1.17 | length 1068.5
  Top Layer w10: U1.17 3991.01,3078.27 4025.55,3112.81 4035.62,3112.81 v1(4093.91,3171.09)
  Bottom Layer w10: P2.33 4093.81,3722.21 4093.81,3171.19 v1(4093.91,3171.09)
PF2: P2.31 U1.18 | length 1106.2
  Top Layer w10: U1.18 4003.58,3058.58 v1(4035,3090)
  Bottom Layer w10: v1(4035,3090) 4045.07,3090 4122.52,3167.45 P2.31
PF3: P2.29 U1.19 | length 1150.5
  Top Layer w10: U1.19 4016.16,3038.9 4062.19,3084.93 4062.19,3089.45 4075.55,3102.81 4092.81,3102.81 v1(4105,3115)
  Bottom Layer w10: v1(4105,3115) 4151.19,3161.19 4151.19,3722.17 P2.29
PF4: P2.27 U1.20 | length 1188
  Top Layer w10: U1.20 3619.94,3020.22 4025.22,3020.22 v1(4085,3080)
  Bottom Layer w10: v1(4085,3080) 4102.26,3080 4167.19,3144.93 4167.19,3334.45 4185.51,3352.77 P2.27
PF5: P2.25 U1.21 | length 1284.1
  Top Layer w10: U1.21 3839.46,2999.53 3844.15,3004.22 4020.78,3004.22 v1(4035,2990)
  Bottom Layer w10: v1(4035,2990) 4120,2990 4217.01,3087.01 P2.25
PF6: P4.27 U1.24 | length 1214.1
  Top Layer w10: U1.24 3802.27,2940.47 3805.55,2937.19 3824.45,2937.19 3825.07,2937.81 4087.19,2937.81 v1(4090,2935)
  Bottom Layer w10: v1(4090,2935) 4112.81,2912.19 4112.81,2213.72 P4.27
PF7: P4.25 U1.25 | length 1157.5
  Top Layer w10: U1.25 4050.53,2920.79 4056.31,2915 v1(4060,2915)
  Bottom Layer w10: v1(4060,2915) 4067.19,2907.81 4067.19,2545.55 4074.57,2538.17 P4.25
PF8: P4.23 U1.26 | length 1095.3
  Top Layer w10: U1.26 3619.28,2900.76 4004.24,2900.76 v1(4020,2885)
  Bottom Layer w10: v1(4020,2885) 4043.07,2861.93 P4.23
PF9: P4.21 U1.27 | length 1041.9
  Top Layer w10: U1.27 3619.28,2881.07 3968.93,2881.07 v1(3985,2865)
  Bottom Layer w10: v1(3985,2865) 4011.57,2838.43 P4.21
PF10: P4.19 U1.28 | length 992
  Top Layer w10: U1.28 3924.58,2861.73 3936.31,2850 v1(3940,2850)
  Bottom Layer w10: v1(3940,2850) 3987.81,2802.19 3987.81,2530.55 3980.08,2522.82 P4.19
PF11: P4.26 U1.59 | length 419
  Top Layer w10: U1.59 3972.36,2252.64 4075,2150 v1(4075,2092.5)
PF12: P4.28 U1.60 | length 440.7
  Top Layer w10: U1.60 3992.05,2262.95 4105,2150 v1(4105,2075)
PF13: P4.30 U1.63 | length 410.8
  Top Layer w10: U1.63 4051.1,2233.9 4140,2145 v1(4140,2095)
PF14: P4.32 U1.64 | length 440
  Top Layer w10: U1.64 4070.79,2244.21 4170,2145 v1(4170,2070)
PF15: P4.34 U1.65 | length 424.3
  Top Layer w10: U1.65 4090.47,2249.53 4200,2140 v1@4200,2090
  other v1: 4199.98,2088.91
PG0: P4.36 U1.66 | length 451.2
  Top Layer w10: U1.66 4110.16,2254.84 4232.82,2132.18 v1(4232.82,2068.53)
PG1: P4.38 U1.67 | length 437
  Top Layer w10: U1.67 4129.84,2260.16 4265,2125 4265,2095 v1@4260,2090
  other v1: 4262.5,2092.5
PG2: P4.39 U1.106 | length 944
  Top Layer w10: v1(4320,2810) 4391.42,2881.42 U1.106
  Bottom Layer w10: P4.39 4295.04,2785.04 v1(4320,2810)
PG3: P4.37 U1.107 | length 998.6
  Top Layer w10: v1(4310,2855) 4340,2855 4386.1,2901.1 U1.107
  Bottom Layer w10: P4.37 4262.19,2208.32 4262.19,2539.93 4267.81,2545.55 4267.81,2812.81 v1(4310,2855)
PG4: P4.35 U1.108 | length 1056.4
  Top Layer w10: v1(4300,2895) 4350,2895 4375.79,2920.79 U1.108
  Bottom Layer w10: P4.35 4232.05,2534.91 4221.8,2545.16 4221.8,2816.8 v1(4300,2895)
PG5: P4.33 U1.109 | length 1088
  Top Layer w10: v1(4325,2925) 4328.69,2925 4343.69,2940 4360,2940 4360.47,2940.47 U1.109
  Bottom Layer w10: P4.33 4200.55,2827.81 4297.74,2925 v1(4325,2925)
PG6: P4.31 U1.110 | length 1134.3
  Top Layer w10: v1(4260,2930) 4290.16,2960.16 U1.110
  Bottom Layer w10: P4.31 4169.06,2839.06 v1(4260,2930)
PG7: P4.29 U1.111 | length 1178.9
  Top Layer w10: v1(4225,2935) 4269.84,2979.84 U1.111
  Bottom Layer w10: P4.29 4137.56,2847.56 v1(4225,2935)
PG8: P2.23 U1.112 | length 1162.9
  Top Layer w10: v1(4222.19,2980) 4229.38,2980 4247.19,2997.81 4619.35,2997.81 U1.112
  Bottom Layer w10: v1(4222.19,2980) 4222.19,3039.45 4240,3057.26 4240,3678.31 4248.5,3686.81 P2.23
PG9: P2.20 U1.152 | length 442.3
  Top Layer w10: U1.152 4169.21,3654.21 4310,3795 v1(4310,3855)
PG10: P2.22 U1.153 | length 413
  Top Layer w10: U1.153 4149.53,3669.53 4280,3800 v1(4280,3830)
PG11: P2.24 U1.154 | length 448.7
  Top Layer w10: U1.154 4129.84,3674.84 4250,3795 v1(4250,3870)
PG12: P2.26 U1.155 | length 407.3
  Top Layer w10: U1.155 4110.16,3680.16 4217.02,3787.02 v1(4217.02,3834.12)
PG13: P2.28 U1.156 | length 433.1
  Top Layer w10: U1.156 4090.47,3695.47 4185,3790 v1(4185,3865)
PG14: P2.30 U1.157 | length 394.5
  Top Layer w10: U1.157 4070.79,3548.1 4070,3548.89 4070,3700 4155,3785 v1(4155,3830)
PG15: P2.32 U1.160 | length 435.9
  Top Layer w10: U1.160 4011.73,3676.73 4125,3790 v1(4125,3860)
PH2: P4.3 U1.43 | length 509.9
  Top Layer w10: U1.43 3678.54,2566.46 3687.09,2575 v1(3695,2575)
  Bottom Layer w10: v1(3695,2575) 3722.26,2575 3747.81,2549.45 3747.81,2530.55 3713.27,2496.01 3713.27,2263.75 3732.95,2244.06 3732.95,2211.81 P4.3
PH3: P4.1 U1.44 | length 398.3
  Top Layer w10: U1.44 3600.84,2546.77 3600,2545.94 3665,2480.94 v1(3665,2425)
  Bottom Layer w10: v1(3665,2425) 3665,2380 3696.61,2348.39 P4.1
PH4: P4.2 U1.45 | length 473.1
  Top Layer w10: v1(3695,2015) 3719,2039 3719,2376 3697.81,2397.19 3697.81,2467.9 U1.45
PH5: P4.4 U1.46 | length 463.7
  Top Layer w10: U1.46 3716.46,2408.54 3735,2390 3735,2020 v1(3730,2015)
PH6: P4.49 U1.83 | length 271.4
  Top Layer w10: U1.83 4444.8,2354.8 4455,2344.61 v1(4455,2295)
  Bottom Layer w10: P4.49 4452.52,2245.16 4460,2252.64 4460,2290 v1(4455,2295)
PH7: P4.51 U1.84 | length 222.4
  Top Layer w10: U1.84 4465.16,2468.26 4465.16,2359.84 4485,2340 v1(4485,2255)
PH8: P4.53 U1.85 | length 251.7
  Top Layer w10: U1.85 4484.17,2370.83 4515,2340 v1(4515,2230)
PH9: P4.55 U1.86 | length 231
  Top Layer w10: U1.86 4503.86,2386.14 4545,2345 v1(4545,2255)
PH10: P4.57 U1.87 | length 262.3
  Top Layer w10: U1.87 4523.54,2401.46 4580,2345 v1(4580,2230)
PH11: P4.59 U1.88 | length 241.6
  Top Layer w10: U1.88 4543.23,2411.77 4610,2345 v1(4610,2255)
PH12: P3.1 U1.89 | length 81.7
  Top Layer w10: v1(4585,2480) 4621.06,2516.06 U1.89
PH13: P3.51 U1.128 | length 470.7
  Top Layer w10: v1(4375,3330) 4375,3322.26 4407.26,3290 4479.89,3290 4504.38,3314.49 U1.128
  Bottom Layer w10: v1(4375,3330) 4375,3322.26 4407.81,3289.45 4420.07,3277.19 4535.21,3277.19 P3.51
PH14: P3.53 U1.129 | length 361.9
  Top Layer w10: v1(4410,3320) 4412.67,3320 4422.67,3310 4477.26,3310 4501.43,3334.17 U1.129
  Bottom Layer w10: v1(4410,3320) 4423.69,3306.31 4537.58,3306.31 P3.53
PH15: P3.55 U1.130 | length 279
  Top Layer w10: v1(4445,3335) 4470,3335 4487.19,3352.19 4619.39,3352.19 U1.130
  Bottom Layer w10: v1(4445,3335) 4539.61,3335 P3.55
PI0: P3.57 U1.131 | length 352.9
  Top Layer w10: v1(4415,3355) 4417.81,3357.81 4462.7,3357.81 4475.65,3370.76 4615.37,3370.76 4619.61,3375 U1.131
  Bottom Layer w10: v1(4415,3355) 4417.81,3357.81 4454.45,3357.81 4456.02,3356.24 4513.13,3356.24 4531.89,3375 P3.57
PI1: P3.59 U1.132
  other v1: 4585,3400
PI2: P2.1 U1.133 | length 250.4
  Top Layer w10: U1.133 4543.23,3573.23 4595,3625 v1(4595,3700)
PI3: P2.3 U1.134 | length 226.1
  Top Layer w10: U1.134 4523.54,3578.54 4565,3620 4565,3670 v1(4565,3680)
PI4: P2.54 U1.173 | length 353.3
  Top Layer w10: U1.173@3755,3485 3755,3790 3775,3810 v1(3775,3830)
PI5: P2.56 U1.174 | length 397.6
  Top Layer w10: U1.174 3736.14,3796.14 3745,3805 v1(3745,3865)
PI6: P2.58 U1.175 | length 361
  Top Layer w10: v1(3713.75,3830.92) 3713.75,3509.7 3716.46,3506.99 U1.175
PI7: P2.60 U1.176 | length 400.9
  Top Layer w10: v1(3680,3865) 3680,3523.27 3696.77,3506.5 U1.176
PI8: P2.49 U1.7 | length 641.6
  Top Layer w10: U1.7 3780.12,3275.12 v1(3805,3300)
  Bottom Layer w10: v1(3805,3300) 3807.26,3300 3844.81,3337.55 3844.81,3719.24 P2.49
PI9: P2.41 U1.11 | length 845.7
  Top Layer w10: U1.11 3901.38,3196.38 v1(3975,3270)
  Bottom Layer w10: P2.41 3965.04,3279.96 v1(3975,3270)
PI10: P2.39 U1.12 | length 897.9
  Top Layer w10: U1.12 3936.69,3176.69 v1(4005,3245)
  Bottom Layer w10: P2.39 3997.81,3723.72 3997.81,3252.19 v1(4005,3245)
PI11: P2.37 U1.13 | length 932.6
  Top Layer w10: U1.13 3952.01,3157.01 v1(4005,3210)
  Bottom Layer w10: v1(4005,3210) 4028.03,3233.03 P2.37
RST: C18.2 key1.2 U1.31 | length 177.6
  Top Layer w10: key1.2 3500,2779.84 3540,2819.84 ; v1(3540,2845) 3540,2819.84 ; U1.31 3557.17,2802.68 3540,2819.84
VCC3.3: U3.1 U3.3 U3.9 U3.14 U3.27 U3.43 U3.49
VDDA: C14.2 R7.2 R8.1 U1.39 | length 296.2
  Top Layer w10: v1(3475,2710) 3475,2707.74 3537.54,2645.2 U1.39
  Bottom Layer w10: C14.2 3475,2780 R7.2 3530,2725 R8.1
VREF+: C15.1 R8.2 U1.38 | length 149.3
  Top Layer w10: v1(3540,2675) 3545,2670 3550.12,2664.88 U1.38
  Bottom Layer w10: R8.2 v1(3540,2675) 3585,2675 3590,2680 C15.1
pads on no net: P3.2 P3.4 P3.6 P3.8 P3.10 P3.12 P3.14 P3.16 P3.18 P3.19 P3.20 P3.21 P3.22 P3.23 P3.24 P3.25 P3.26 P3.27 P3.28 P3.29 P3.30 P3.31 P3.32 P3.33 P3.34 P3.35 P3.36 P3.37 P3.38 P3.39 P3.40 P3.42 P3.44 P3.46 P3.48 P3.50 P3.52 P3.54 P3.56 P3.58 P3.60 U1.6 U2.4 U3.40 USBC1. USBC1.0 USBC1.A5 USBC1.A8 USBC1.B5 USBC1.B8

## Silkscreen, mask and mechanical layers (free items; w line width, h text height)
Top Overlay:
  text "H743_IIT6_V1" at 4070,2015 h60
Mechanical 1:
  lines w15: 4685,1960 4740,1960 ; 4740,1960 ccw(c4740,2010) 4790,2010 4790,3925 ccw(c4740,3925) 4740,3975 3445,3975 ccw(c3445,3925) 3395,3925 3395,2010 ccw(c3445,2010) 3445,1960 4740,1960